# Altium PCB ZLS-027.PcbDoc
Units mil, origin at the board's own origin, x right, y up, seen from the top; angles counter-clockwise.
Board outline 6000 x 4000 mil, 2 copper layers (Top Layer, Bottom Layer); 5 components, 4 nets, 14 pads, 0 vias.
Unrouted connection lines stored in the file: 9.
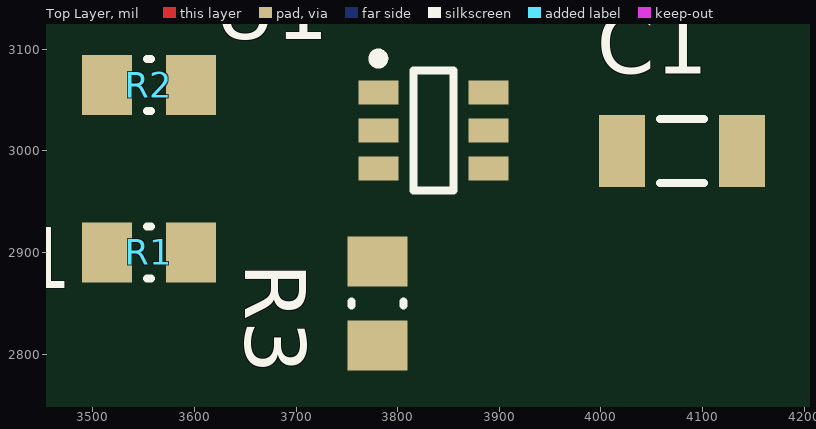
[diagram p0: Top Layer view]
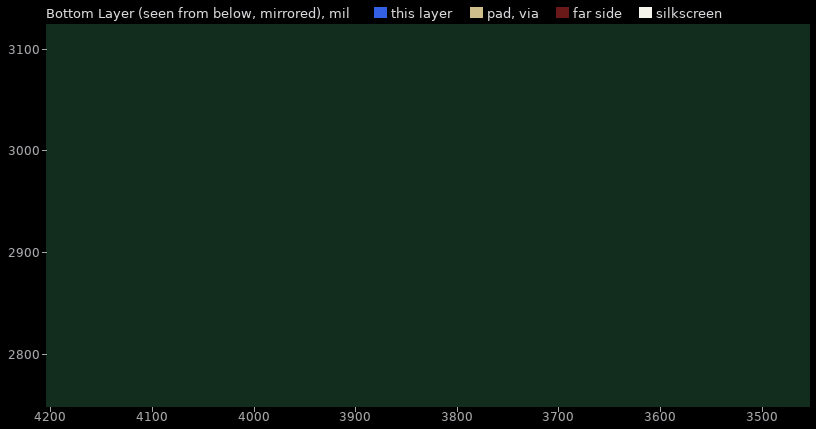
[diagram p1: Bottom Layer view, seen from below]

## Layer stack, top to bottom
Top Solder: solder mask 0.4, Solder Resist, Dk 3.5
Top Layer: signal copper 1.4
Dielectric 1: dielectric 12.6, FR-4, Dk 4.8
Bottom Layer: signal copper 1.4
Bottom Solder: solder mask 0.4, Solder Resist, Dk 3.5

## Board outline
1000,1000 7000,1000 7000,5000 1000,5000

## Design rules (kind name [scope] priority, off if disabled: settings)
Clearance [All] p1: gap=10 ignorepadtopadclearanceinfootprint=FALSE except(0: Arc-Hole Track-Hole SMDPad-Hole THPad-Hole Via-Hole Fill-Hole Poly-Hole Region-Hole Text-Hole)
PolygonConnect [All] p1: connectstyle=Relief reliefconductorwidth=10 reliefentries=4 polygonreliefangle="90 Angle" airgapwidth=10
RoutingVias [All] p1: holewidth=28 width=50 viastyle="Through Hole" minholewidth=28 minwidth=50 maxholewidth=28 maxwidth=50
SolderMaskExpansion [All] p1: expansion=4
Width [All] p1: maxlimit=10 minlimit=10 preferedwidth=10
30 further rules are at their usual default settings.

## Components (designator, comment, footprint, x,y, rotation, side; value= is the part's Value field where it differs from the comment)
C1 "" CAPC1206(3216)110_N 4080,3000 r180 top value=4.7uF
R1 "RES SMD 43K OHM 1% 1/8W 0805" RESC0805(2012)_M 3555,2900 r180 top
R2 "RES SMD 43K OHM 1% 1/8W 0805" RESC0805(2012)_M 3555,3065 r0 top
R3 "RES SMD 43K OHM 1% 1/8W 0805" RESC0805(2012)_M 3780,2850 r90 top
U1 "LTC6992" SOT95P280X445-6N 3835,3020 r0 top

## Footprints (in the part's own frame and the unit in brackets; to place one, negate y for a bottom-side part, rotate by r counter-clockwise, add the part's x,y. Pads: shape width x height; smd on the part's side, far side on the other; paste and mask are expansions set on the pad)
CAPC1206(3216)110_N [mm] "Chip Capacitor, Body 3.2x1.6mm, Height 1.1mm, IPC Medium Density"
  rect 1.15x1.8 smd: 1(-1.5,0) 2(1.5,0)
  silkscreen extent -0.55,-0.8 0.55,0.8, body extent -1.7,-0.9 1.7,0.9, height 1.1
RESC0805(2012)_M [mm] "Chip Resistor, Body 2.0x1.3mm, IPC Low Density"
  rect 1.25x1.5 smd: 1(-1.05,0) 2(1.05,0)
  silkscreen extent -0.05,-0.65 0.05,0.65, body extent -1.1,-0.67 1.1,0.67, height 0.7
SOT95P280X445-6N [mm] "SOT23, 6-Leads, Body 2.90x2.80mm, Pitch 0.95mm, IPC Medium Density"
  rect 1x0.6 smd: 1(-1.375,0.95) 2(-1.375,0) 3(-1.375,-0.95) 4(1.375,-0.95) 5(1.375,0) 6(1.375,0.95)
  silkscreen extent -1.5,-1.5 0.5,1.92, body extent -1.5,-1.5 1.5,1.5, height 4.45

## Part data
C1: library part CMP-1037-04332-1
R1: library part CMP-1013-00017-1, "RES SMD 10K OHM 1% 1/8W 0805", Resistance (Ohms)=50k
R2: library part CMP-1013-00017-1, "RES SMD 10K OHM 1% 1/8W 0805", Resistance (Ohms)=10k
R3: library part CMP-1013-00017-1, "RES SMD 10K OHM 1% 1/8W 0805", Resistance (Ohms)=392k
U1: Base Part Number=LTC6992-1, Frequency="3.81Hz ~ 1MHz", Manufacturer="Linear Technology/Analog Devices", Manufacturer Part Number=LTC6992IS6-1#TRMPBF, Operating Temperature="-40°C ~ 85°C", Package / Case="SOT-23-6 Thin, TSOT-23-6", Supplier Device Package=TSOT-23-6, Supplier Part Number 1=LTC6992IS6-1#TRMPBFCT-ND, Voltage - Supply="2.25 V ~ 5.5 V", Category="Integrated Circuits (ICs)", ComponentLink1Description=http://www.linear.com/docs/29337, ComponentLink1URL=http://www.linear.com/docs/29337, Count=-, Mounting Type="Surface Mount", Packaging="Cut Tape (CT)", Part Status=Active, Pricing 1="1=4.48, 25=3.998, 100=2.5459, 250=2.33376 (USD)", RoHS="RoHS Compliant", Stock 1=573, Supplier 1=Digi-Key, Type="Oscillator, Silicon"

## Nets (pads, with @x,y where several pads share a name; then routed paths per layer and width w, separated by ;. In a path a pad name is that pad's centre, name@x,y a point inside that pad or via, vN(x,y) a via of type N, cw(c..) or ccw(c..) an arc to the next point about the centre after c; other vN are vias at no path point)
+5: C1.2 R1.2 U1.5
A0V: C1.1 R2.1 R3.1 U1.2 U1.4
NetR1_1: R1.1 R2.2 U1.1
NetR3_2: R3.2 U1.3
pads on no net: U1.6